# EAGLE board Motherboard Rev B - Initial Draft (EAGLE 9.1.1)
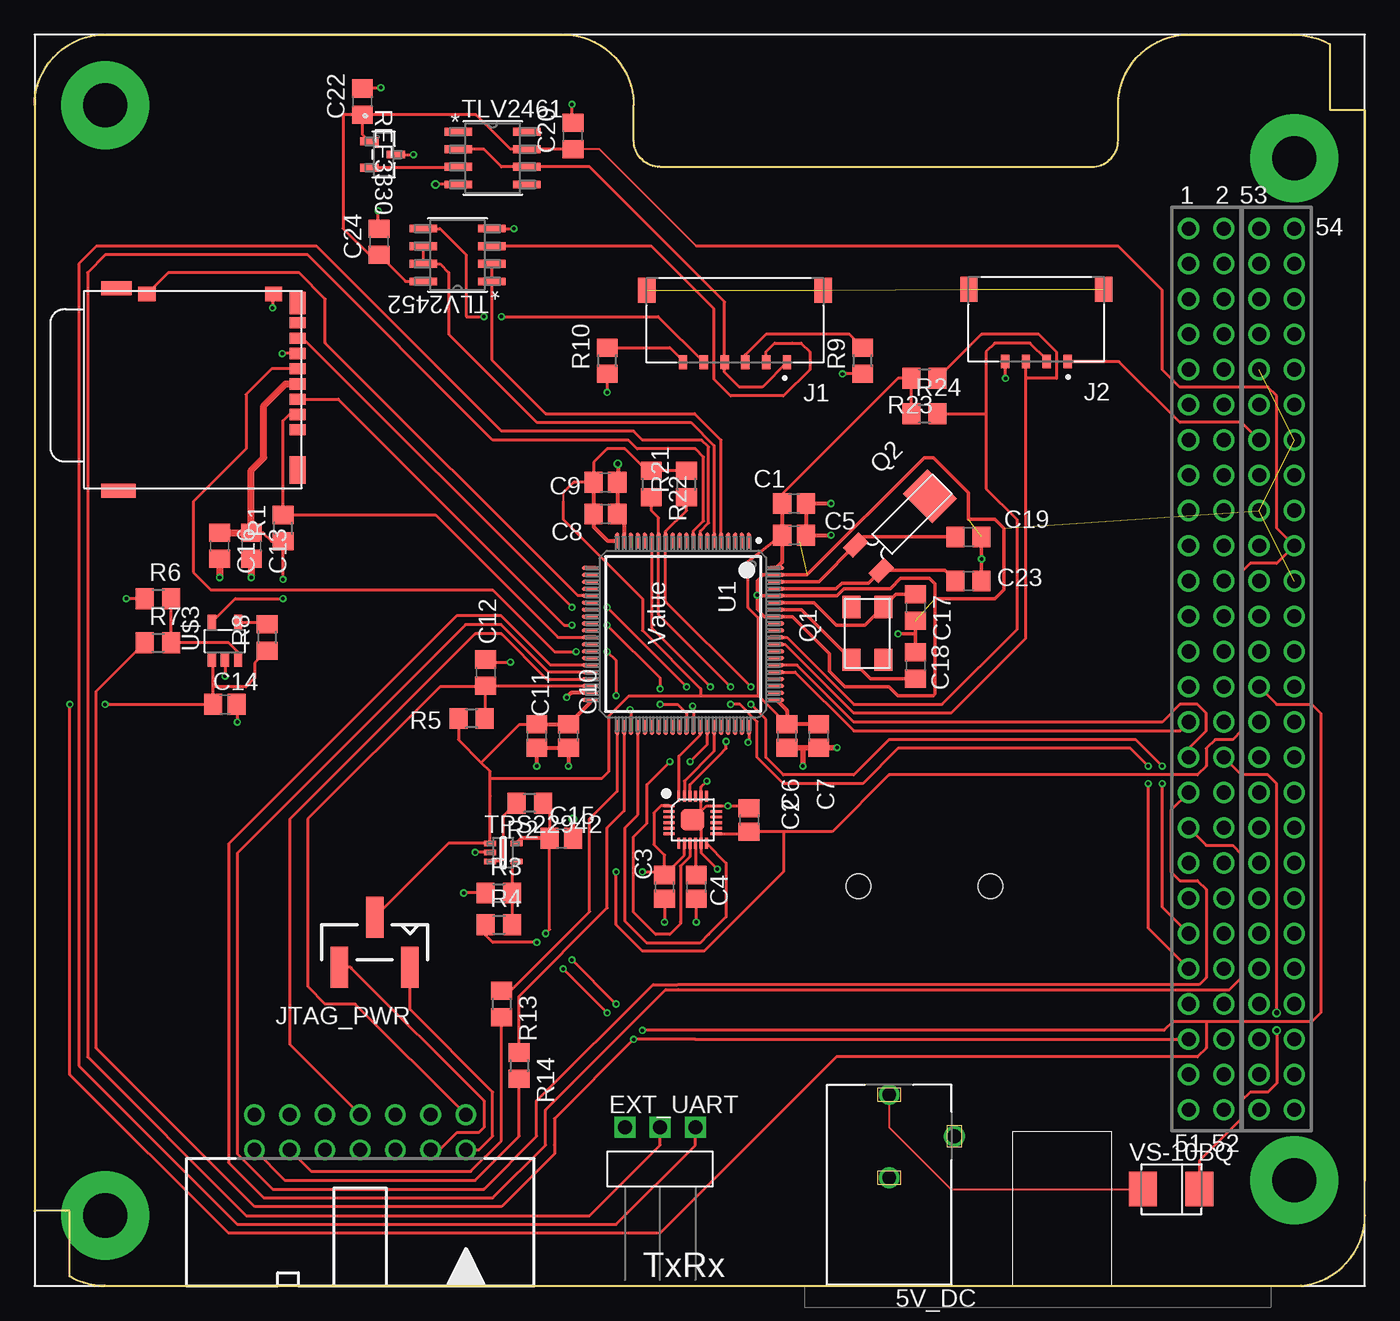
[diagram p0: board, top side]
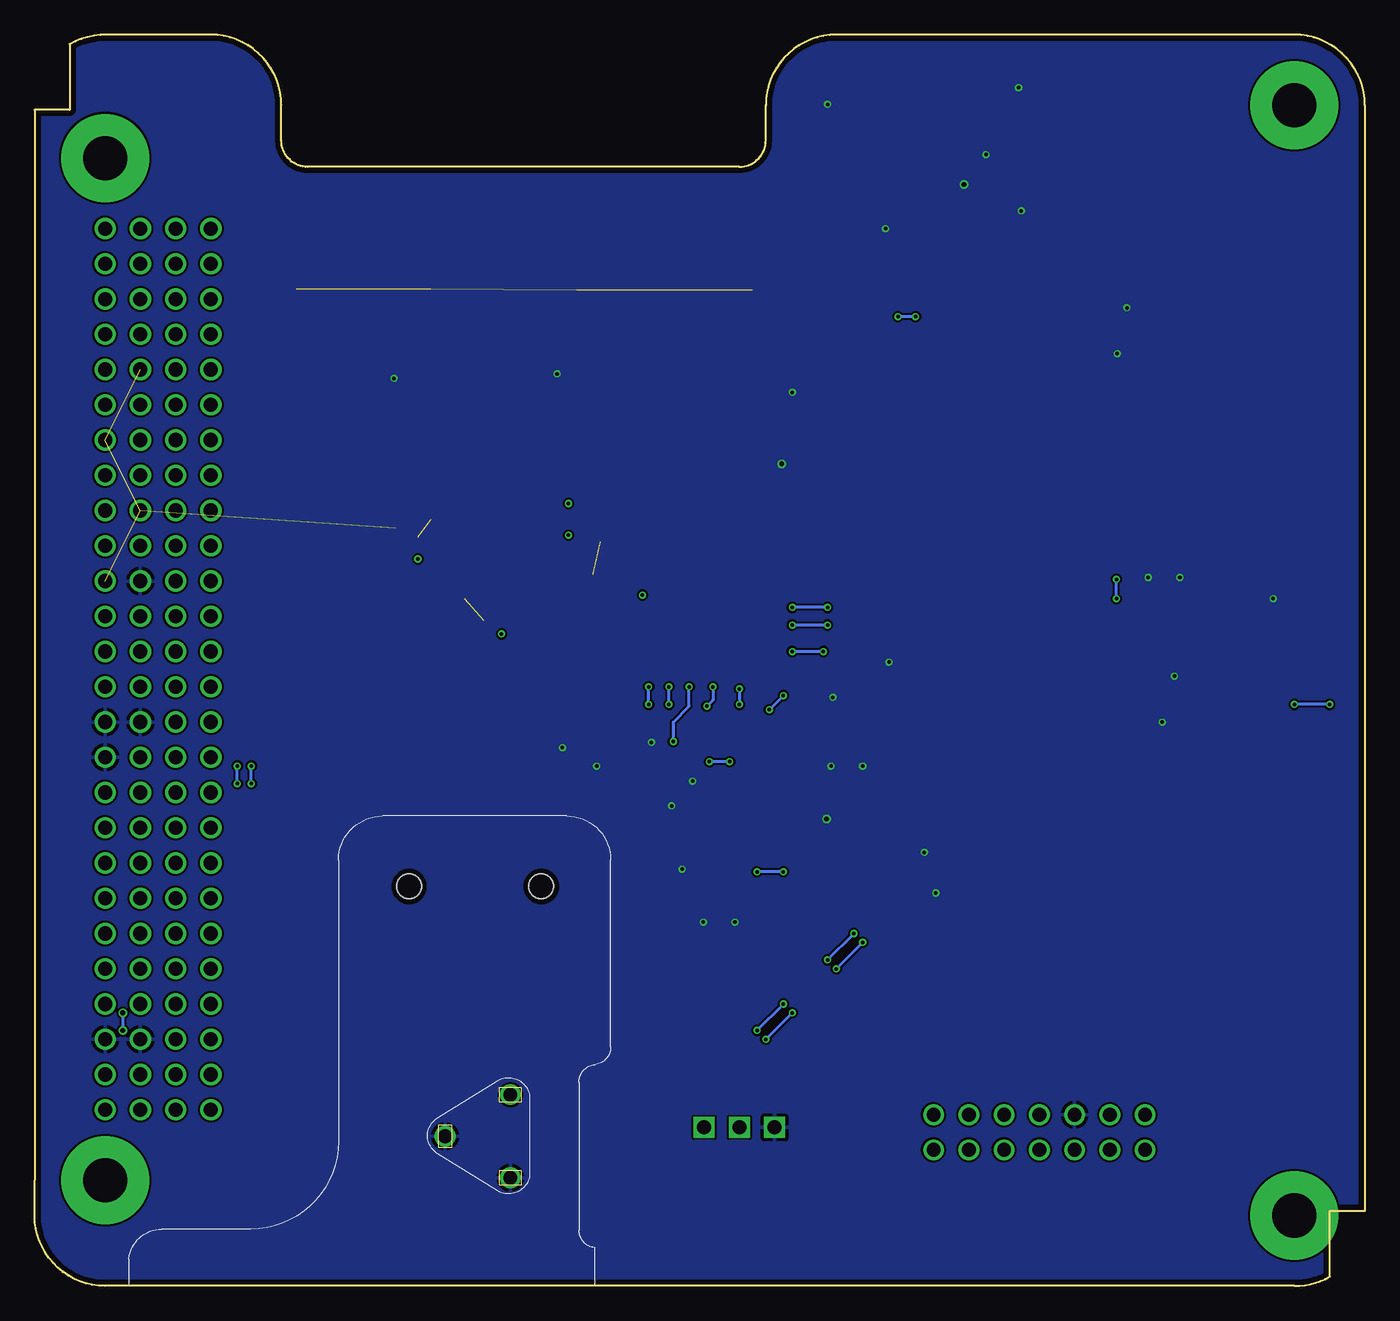
[diagram p1: board, bottom side, seen from below]

Size 95.89 x 90.17 mm. Coordinates in mm from the lower left corner, seen from the top.
Outline: 0,85.09 0,5.41 2.23,5.41 2.52,5.41 2.52,0.69 arc31 5.08,0 90.81,0 arc90 95.89,5.08 95.89,7.62 95.89,84.76 93.37,84.76 93.37,89.48 arc30 90.68,90.17 83.19,90.17 arc90 78.11,85.09 78.11,82.55 arc-90 76.2,80.64 45.09,80.64 arc-90 43.18,82.55 43.18,85.09 arc90 38.1,90.17 5.08,90.17 arc90 0,85.09
Copper layers (1*16): Top 0.035559375mm / dielectric 1.6mm / Bottom 0.035559375mm
Design rules "oshpark-2layer": minimum track width 6mil, minimum drill 10mil, track to track 6mil, track to pad 6mil, pad to pad 6mil, via to via 6mil, smd to smd 6mil, copper to edge 15mil, drill to drill 6mil, minimum pad ring 5mil, minimum via ring 5mil, stop-mask expansion 2.5mil, vias tented up to drill 0mil, thermal gap 10mil

## Footprints (pad centres in the part's own frame; a part is rotated, then mirrored left to right if it is on the bottom)
CUI_PJ-102A = drill 1: 1 0,-3; 2 0,3; 3 -4.7,0
C0805 = smd 1.3 x 1.5: 1 -0.85,0; 2 0.85,0
C0805' = smd 1.3 x 1.5: 1 -0.95,0; 2 0.95,0
90121-0763 = drill 1 square: 1 0,0; 2 2.54,0; 3 5.08,0
MOLEX_5040500691 = smd 0.6 x 1: 1 -3.75,3.04; 2 -2.25,3.04; 3 -0.75,3.04; 4 0.75,3.04; 5 2.25,3.04; 6 3.75,3.04 | smd 1.25 x 1.8: SH1 6.355,-2.15; SH2 -6.355,-2.15
MOLEX_5040500491 = smd 0.6 x 1: 1 -2.25,3.04; 2 -0.75,3.04; 3 0.75,3.04; 4 2.25,3.04 | smd 1.25 x 1.8: SH1 4.855,-2.15; SH2 -4.855,-2.15
SL_87898_3 = smd 1.27 x 2.946: 1 -2.54,1.803; 2 0,-1.803; 3 2.54,1.803
5X3.2 = smd 1.6 x 1.3: 1 0.6,2.75; 2 4.4,0.45; NC1 0.6,0.45; NC2 4.4,2.75
MS1V-T1K = smd 1.6 x 1: 1 7.5,1.3; 2 7.5,-1.3 | smd 2.5 x 3: MNT 1.25,0
R0805 = smd 1.3 x 1.5: 1 -0.95,0; 2 0.95,0
RBF_MOUNT = hole 1.778: 28.793,29.718; 28.793,20.193
DBZ3 = smd 0.559 x 1.321: 1 -0.95,-1.016; 2 0.95,-1.016; 3 0,0.883
502702 = smd 0.8 x 1.16: 1 4.9,0.58; 2 6,0.58; 3 7.1,0.58; 4 8.2,0.58; 5 9.3,0.58; 6 10.4,0.58; 7 11.5,0.58; 8 12.6,0.58 | smd 1.05 x 1.25: DET 14.685,11.45; GND 14.685,2.325 | smd 1 x 2.5: MNT1 0.5,13.5 | smd 2 x 1.16: MNT2 2,0.58 | smd 1.6 x 1.16: MNT3 14.04,0.58 | smd 1 x 2.2: MNT4 15.1,13.65
D8 = smd 1.981 x 0.559: 1 -2.464,1.905; 2 -2.464,0.635; 3 -2.464,-0.635; 4 -2.464,-1.905; 5 2.464,-1.905; 6 2.464,-0.635; 7 2.464,0.635; 8 2.464,1.905
DCK0005A = smd 0.85 x 0.4: 1 -0.95,0.65; 2 -0.95,0; 3 -0.95,-0.65; 4 0.95,-0.65; 5 0.95,0.65
PN0080A_N = smd 1.15 x 0.3: 1 -6.725,4.75; 2 -6.725,4.25; 3 -6.725,3.75; 4 -6.725,3.25; 5 -6.725,2.75; 6 -6.725,2.25; 7 -6.725,1.75; 8 -6.725,1.25; 9 -6.725,0.75; 10 -6.725,0.25; 11 -6.725,-0.25; 12 -6.725,-0.75; 13 -6.725,-1.25; 14 -6.725,-1.75; 15 -6.725,-2.25; 16 -6.725,-2.75; 17 -6.725,-3.25; 18 -6.725,-3.75; 19 -6.725,-4.25; 20 -6.725,-4.75; 41 6.725,-4.75; 42 6.725,-4.25; 43 6.725,-3.75; 44 6.725,-3.25; 45 6.725,-2.75; 46 6.725,-2.25; 47 6.725,-1.75; 48 6.725,-1.25; 49 6.725,-0.75; 50 6.725,-0.25; 51 6.725,0.25; 52 6.725,0.75; 53 6.725,1.25; 54 6.725,1.75; 55 6.725,2.25; 56 6.725,2.75; 57 6.725,3.25; 58 6.725,3.75; 59 6.725,4.25; 60 6.725,4.75 | smd 0.3 x 1.15: 21 -4.75,-6.725; 22 -4.25,-6.725; 23 -3.75,-6.725; 24 -3.25,-6.725; 25 -2.75,-6.725; 26 -2.25,-6.725; 27 -1.75,-6.725; 28 -1.25,-6.725; 29 -0.75,-6.725; 30 -0.25,-6.725; 31 0.25,-6.725; 32 0.75,-6.725; 33 1.25,-6.725; 34 1.75,-6.725; 35 2.25,-6.725; 36 2.75,-6.725; 37 3.25,-6.725; 38 3.75,-6.725; 39 4.25,-6.725; 40 4.75,-6.725; 61 4.75,6.725; 62 4.25,6.725; 63 3.75,6.725; 64 3.25,6.725; 65 2.75,6.725; 66 2.25,6.725; 67 1.75,6.725; 68 1.25,6.725; 69 0.75,6.725; 70 0.25,6.725; 71 -0.25,6.725; 72 -0.75,6.725; 73 -1.25,6.725; 74 -1.75,6.725; 75 -2.25,6.725; 76 -2.75,6.725; 77 -3.25,6.725; 78 -3.75,6.725; 79 -4.25,6.725; 80 -4.75,6.725
PC104_NO_DIMENSION = drill 1.016 pad 1.524: 1 83.185,76.2; 2 85.725,76.2; 3 83.185,73.66; 4 85.725,73.66; 5 83.185,71.12; 6 85.725,71.12; 7 83.185,68.58; 8 85.725,68.58; 9 83.185,66.04; 10 85.725,66.04; 11 83.185,63.5; 12 85.725,63.5; 13 83.185,60.96; 14 85.725,60.96; 15 83.185,58.42; 16 85.725,58.42; 17 83.185,55.88; 18 85.725,55.88; 19 83.185,53.34; 20 85.725,53.34; 21 83.185,50.8; 22 85.725,50.8; 23 83.185,48.26; 24 85.725,48.26; 25 83.185,45.72; 26 85.725,45.72; 27 83.185,43.18; 28 85.725,43.18; 29 83.185,40.64; 30 85.725,40.64; 31 83.185,38.1; 32 85.725,38.1; 33 83.185,35.56; 34 85.725,35.56; 35 83.185,33.02; 36 85.725,33.02; 37 83.185,30.48; 38 85.725,30.48; 39 83.185,27.94; 40 85.725,27.94; 41 83.185,25.4; 42 85.725,25.4; 43 83.185,22.86; 44 85.725,22.86; 45 83.185,20.32; 46 85.725,20.32; 47 83.185,17.78; 48 85.725,17.78; 49 83.185,15.24; 50 85.725,15.24; 51 83.185,12.7; 52 85.725,12.7; 53 88.265,76.2; 54 90.805,76.2; 55 88.265,73.66; 56 90.805,73.66; 57 88.265,71.12; 58 90.805,71.12; 59 88.265,68.58; 60 90.805,68.58; 61 88.265,66.04; 62 90.805,66.04; 63 88.265,63.5; 64 90.805,63.5; 65 88.265,60.96; 66 90.805,60.96; 67 88.265,58.42; 68 90.805,58.42; 69 88.265,55.88; 70 90.805,55.88; 71 88.265,53.34; 72 90.805,53.34; 73 88.265,50.8; 74 90.805,50.8; 75 88.265,48.26; 76 90.805,48.26; 77 88.265,45.72; 78 90.805,45.72; 79 88.265,43.18; 80 90.805,43.18; 81 88.265,40.64; 82 90.805,40.64; 83 88.265,38.1; 84 90.805,38.1; 85 88.265,35.56; 86 90.805,35.56; 87 88.265,33.02; 88 90.805,33.02; 89 88.265,30.48; 90 90.805,30.48; 91 88.265,27.94; 92 90.805,27.94; 93 88.265,25.4; 94 90.805,25.4; 95 88.265,22.86; 96 90.805,22.86; 97 88.265,20.32; 98 90.805,20.32; 99 88.265,17.78; 100 90.805,17.78; 101 88.265,15.24; 102 90.805,15.24; 103 88.265,12.7; 104 90.805,12.7 | drill 3.175 pad 6.35: MNT1 5.08,85.09; MNT2 5.08,5.08; MNT3 90.805,81.28; MNT4 90.805,7.62
LEAD-QFN24 = smd 0.8 x 0.2: 1 -1.7,1; 2 -1.7,0.6; 3 -1.7,0.2; 4 -1.7,-0.2; 5 -1.7,-0.6; 6 -1.7,-1; 13 1.7,-1; 14 1.7,-0.6; 15 1.7,-0.2; 16 1.7,0.2; 17 1.7,0.6; 18 1.7,1 | smd 0.2 x 0.8: 7 -1,-1.7; 8 -0.6,-1.7; 9 -0.2,-1.7; 10 0.2,-1.7; 11 0.6,-1.7; 12 1,-1.7; 19 1,1.7; 20 0.6,1.7; 21 0.2,1.7; 22 -0.2,1.7; 23 -0.6,1.7; 24 -1,1.7 | smd 1.7 x 1.54: 25 0,0
SOT23-5 = smd 0.6 x 1.05: 1 -0.95,-1.35; 2 0,-1.35; 3 0.95,-1.35; 4 0.95,1.35; 5 -0.95,1.35
SMB = smd 2.007 x 2.489: A -2.019,0; C 2.045,0
PAK100/2500-5-14 = drill 1 pad 1.422: 1 -20.16,-12.345; 2 -20.16,-9.805; 3 -17.62,-12.345; 4 -17.62,-9.805; 5 -15.08,-12.345; 6 -15.08,-9.805; 7 -12.54,-12.345; 8 -12.54,-9.805; 9 -10,-12.345; 10 -10,-9.805; 11 -7.46,-12.345; 12 -7.46,-9.805; 13 -4.92,-12.345; 14 -4.92,-9.805

## Placement (x,y rotation side)
5V_DC  PJ-102A  [CUI_PJ-102A]  61.59,10.79 180 top
C1  0.1uF  [C0805]  54.74,56.39 0 top
C2  0.1uF  [C0805]  51.5,33.59 90 top
C3  10nF  [C0805]  45.4,28.77 270 top
C4  0.1uF  [C0805]  47.69,28.77 270 top
C5  1uF  [C0805]  54.74,54.1 0 top
C6  0.1uF  [C0805]  54.23,39.62 270 top
C7  1uF  [C0805]  56.52,39.62 270 top
C8  0.1uF  [C0805]  41.15,55.63 0 top
C9  1uF  [C0805]  41.15,57.91 0 top
C10  0.1uF  [C0805]  38.48,39.62 270 top
C11  1uF  [C0805]  36.2,39.62 270 top
C12  1nF  [C0805']  32.51,44.2 90 top
C13  10uF  [C0805']  15.62,53.34 270 top
C14  10uF  [C0805]  13.72,41.91 0 top
C15  10uF  [C0805]  37.97,32.26 0 top
C16  0.1uF  [C0805']  13.34,53.34 270 top
C17  35pF  [C0805']  63.5,48.9 270 top
C18  35pF  [C0805']  63.5,44.7 90 top
C19  12pF  [C0805']  67.31,53.98 0 top
C20  0.1uF  [C0805']  38.8,82.87 90 top
C22  0.1uF  [C0805']  23.62,85.34 90 top
C23  12pF  [C0805']  67.31,50.8 0 top
C24  0.1uF  [C0805']  24.83,75.25 90 top
EXT_UART  90121-0763  [90121-0763]  42.55,11.43 0 top
J1  MOLEX_504050-0691  [MOLEX_5040500691]  50.48,69.6 180 top
J2  MOLEX_504050-0491  [MOLEX_5040500491]  72.2,69.66 180 top
JTAG_PWR  MOLEX_SL_03-87898  [SL_87898_3]  24.51,24.77 180 top
Q1  16M  [5X3.2]  58.42,49.53 270 top
Q2  32.768k  [MS1V-T1K]  65.41,57.78 225 top
R1  47k  [R0805]  17.91,54.61 90 top
R2  100k  [R0805]  35.69,34.8 180 top
R3  100k  [R0805]  33.46,28.32 0 top
R4  0  [R0805]  33.46,26.04 0 top
R5  47k  [R0805]  31.5,40.89 180 top
R6  100k  [R0805]  8.89,49.53 0 top
R7  0  [R0805]  8.89,46.35 0 top
R8  100k  [R0805]  16.76,46.74 90 top
R9  100  [R0805]  59.69,66.67 90 top
R10  100  [R0805]  41.27,66.67 90 top
R13  0  [R0805]  33.66,20.32 270 top
R14  0  [R0805]  34.92,15.88 270 top
R21  10k  [R0805]  46.99,57.78 90 top
R22  10k  [R0805]  44.45,57.78 270 top
R23  10k  [R0805]  64.14,65.41 180 top
R24  10k  [R0805]  64.14,62.87 0 top
RBF_MOUNT  [RBF_MOUNT]  89.09,0 90 top
REF3330  REF3330_DBZ_3  [DBZ3]  25.15,81.53 270 top
SD_CONN  502702-0891  [502702]  19.55,56.8 90 top
TLV2452  TLV2452  [D8]  30.48,74.3 180 top
TLV2461  TLV2461A_D_8  [D8]  33.02,81.28 0 top
TPS22942  TPS22942DCKR  [DCK0005A]  33.78,31.24 0 top
U1  Value  [PN0080A_N]  46.74,46.99 270 top
U$1  PC104_NO_DIMENSION  [PC104_NO_DIMENSION]  0,0 0 top
U$2  MPU-9250  [LEAD-QFN24]  47.43,33.59 0 top
U$3  FPF2105  [SOT23-5]  13.72,46.48 0 top
VS-10BQ  10BQ015HM3  [SMB]  81.92,6.99 0 top
X1  2514-5  [PAK100/2500-5-14]  10.92,0 180 top

## Library data of the parts
5V_DC = PJ-102A; AVAILABILITY: Good; DESCRIPTION: 2.0 mm Center Pin%2C 2.5 A%2C Right Angle%2C Through Hole%2C Tapered Pins%2C Dc Power Jack Connector; MANUFACTURER: CUI inc; MF: CUI; MP: PJ-102A; PACKAGE: None; PRICE: 0.44 USD
C1-C11 C14 C15 = adafruit
C12 C13 C16-C20 C22-C24 R1-R10 R13 R14 R21-R24 = resistor
EXT_UART = Molex 90121-0763
J1 = Molex 504050; AVAILABILITY: Good; DESCRIPTION: Conn Wire to Board HDR 5 POS 1.5mm Solder RA SMD Pico-Lock; MF: Molex; MP: 5040500491; PACKAGE: None
J2 = Molex 504050-0491; AVAILABILITY: Good; DESCRIPTION: Conn Wire to Board HDR 4 POS 1.5mm Solder RA SMD Pico-Lock; MF: Molex; MP: 5040500491; PACKAGE: None
JTAG_PWR = molex-sl-connectors_jw
Q1 = C5BQ
Q2 = MS1V-T1K
RBF_MOUNT U$1 = Cubesat
REF3330 = REF3330; MANUFACTURER_PART_NUMBER: ref3330_dbz_3; VENDOR: Texas Instruments
SD_CONN = Molex SD - 502702
TLV2452 TLV2461 = TLV24xx; MANUFACTURER_PART_NUMBER: tlv2461a_d_8; VENDOR: Texas Instruments
TPS22942 = TPS22942
U1 = VT_Parts_Eagle; MANUFACTURER: Texas Instruments; PARTNUMBER: MSP430FR5994IPNR; REFDES: RefDes; TYPE: TYPE
U$2 = VT_Parts_Eagle
U$3 = FPF2105
VS-10BQ = Vishay 10BQ015HM3
X1 = con-3m

## Nets
3V: J1.1 J1.4 TLV2461.2 TLV2461.6
3V3: C14.1 C15.1 R2.1 R8.1 TPS22942.5 U$1.79 U$3.1
3V3_SD: C13.1 C16.1 R1.1 SD_CONN.4 U$3.5
3V3_UC: C1.1 C5.1 C6.1 C7.1 C8.1 C9.1 C10.1 C11.1 JTAG_PWR.2 R5.2 R21.2 R22.1 R23.2 R24.1 TPS22942.1 U1.20 U1.40 U1.61 U1.80
3V_REF: REF3330.2 TLV2461.3
5V_CHG: U$1.32 VS-10BQ.C
AGND: C1.2 C5.2 C17.2 C18.2 C19.2 C23.2 U1.73 U1.76 U1.79 U$1.61 U$1.66 U$1.69 U$1.74
CLK_IMU: U1.55 U$2.23
CLK_SD: SD_CONN.5 U1.43
CS_IMU: U1.15 U$2.22
CS_SD: R1.2 SD_CONN.2 U1.31
DNU_TEMP_ADC: U1.4
EXT_RXD: EXT_UART.3 U1.8
EXT_TXD: EXT_UART.2 U1.9
GND: 5V_DC.2 5V_DC.3 C2.2 C3.2 C4.2 C6.2 C7.2 C8.2 C9.2 C10.2 C11.2 C12.2 C13.2 C14.2 C15.2 C16.2 C20.2 C22.2 C24.2 EXT_UART.1 J2.4 R3.1 R6.1 R9.1 R10.1 REF3330.3 SD_CONN.6 SD_CONN.GND TLV2452.4 TLV2461.4 TPS22942.2 U1.19 U1.39 U1.60 U$1.73 U$1.81 U$1.82 U$1.84 U$1.99 U$1.100 U$2.11 U$2.18 U$2.20 U$2.25 U$3.2 X1.9
INT_IMU: U1.44 U$2.12
JTAG_RXD: R13.1 U1.41
JTAG_TXD: R14.1 U1.42
LI_OA_RESET: R4.1 R7.1 U$1.47
LITHIUM_RX: U1.65 U$1.29
LITHIUM_TX: U1.66 U$1.31
MISO_IMU: U1.54 U$2.9
MISO_SD: SD_CONN.7 U1.52
MOSI_IMU: U1.53 U$2.24
MOSI_SD: SD_CONN.3 U1.51
N$1: R2.2 TPS22942.3
N$2: R6.2 R7.2 U$3.3
N$3: C4.1 U$2.10
N$4: C17.1 Q1.1 U1.75
N$5: R3.2 R4.2 TPS22942.4
N$7: R8.2 U$3.4
N$8: R14.2 X1.14
N$9: C23.1 Q2.1 U1.77
N$11: R13.2 X1.12
N$12: C18.1 Q1.2 U1.74
N$13: C19.1 Q2.2 U1.78
N$14: 5V_DC.1 VS-10BQ.A
PINAVL1_RX: U1.35 U$1.35
PINAVL1_TX: U1.36 U$1.33
SBWTCK: U1.37 X1.7
SBWTDIO: C12.1 R5.1 U1.38 X1.1
SCL_ANT: J2.2 R24.2 U1.70
SCL_EPS: R22.2 U1.14 U$1.43
SD_DETECT: SD_CONN.DET U1.25
SDA_ANT: J2.3 R23.1 U1.69
SDA_EPS: R21.1 U1.13 U$1.41
SHIELD: J1.SH1 J1.SH2 J2.SH1 J2.SH2
SW5: J2.1 U$1.65
SW10: C2.1 C3.1 C20.1 C22.1 C24.1 REF3330.1 TLV2452.8 TLV2461.7 U$1.72 U$2.1 U$2.8 U$2.13
TMP1: J1.2 TLV2452.3
TMP1_OUT: TLV2452.1 TLV2452.2 U1.5
TMP1_RET: J1.3 R9.2
TMP2: J1.5 TLV2452.5
TMP2_OUT: TLV2452.6 TLV2452.7 U1.6
TMP2_RET: J1.6 R10.2
VCC_TARGET: JTAG_PWR.3 X1.4
VCC_TOOL: JTAG_PWR.1 X1.2

## Tracks (layer width: path | path; a pad name or v marks a point on that pad's centre or on a via)
3V
  Top 0.203: TLV2461.2 32.38,81.92 33.66,80.64 TLV2461.6 40.01,80.64 49.73,70.92 J1.4 49.73,65.84 50.8,64.77 52.45,64.77 J1.1
3V3  (via drill 0.25)
  Top 0.203: U$1.79 89.53,41.91 92.08,41.91 92.71,41.27 92.71,19.68 92.08,19.05 84.45,19.05 | 84.45,19.05 82.04,19.05 | 82.04,19.05 | 12.87,43.18 C14.1 v5.08,41.91 | 12.87,43.18 12.87,45.03 U$3.1 | R8.1 15.88,44.9 15.88,43.81 15.24,43.18 12.87,43.18 | 84.45,19.05 | 84.45,19.05 84.45,17.14 83.82,16.51 57.78,16.51 45.09,3.81 13.97,3.81 2.54,15.24 v2.54,41.91 | 82.04,19.05 81.41,18.41 v43.81,18.41 | R2.1 37.12,34.31 C15.1 37.12,25.69 v36.83,25.4 | v41.91,20.32 v38.73,23.5
  Top 0.305: C15.1 35.1,32.26 TPS22942.5
  Bottom 0.203: v43.81,18.41 v41.91,20.32 | v38.73,23.5 v36.83,25.4 | v2.54,41.91 v5.08,41.91
3V3_SD  (via drill 0.25)
  Top 0.203: C13.1 16.45,54.29 17.08,53.66 R1.1 | R1.1 | U$3.5 14.46,49.53 v17.91,49.53 | v17.91,50.93 R1.1
  Top 0.508: C16.1 C13.1 15.62,58.8 16.51,59.69 16.51,63.44 18.07,65 SD_CONN.4
  Bottom 0.203: v17.91,49.53 v17.91,50.93
3V3_UC
  Top 0.152: 38.1,57.15 | 38.1,57.15 38.1,56.52
  Top 0.203: 32.2,37.72 34.95,40.47 C11.1 | 32.83,36.58 40.89,36.58 41.4,37.08 41.4,41.08 42.84,42.52 48.01,42.52 | JTAG_PWR.2 29.84,31.89 TPS22942.1 32.83,35.31 32.83,36.58 | C5.1 51.44,52.2 51.44,48.88 52.18,48.14 52.18,42.52 | 32.83,36.58 32.83,37.08 32.2,37.72 | R5.2 30.55,39.37 32.2,37.72 | 52.18,42.52 C6.1 | 48.01,42.52 52.18,42.52 | R21.2 R22.1 44.13,58.73 42.55,60.33 41.27,60.33 40.3,59.35 C9.1 38.86,57.91 38.1,57.15 | R24.1 R23.2 62.23,65.41 53.89,57.06 C1.1 | 38.1,56.52 38.1,55.24 43.81,49.53 43.81,47.24 48.01,43.05 48.01,42.52
  Top 0.305: C11.1 C10.1 40.01,42 U1.40 | C9.1 C8.1 40.3,54.7 41.28,53.72 U1.20 | C1.1 C5.1 53.89,52.17 U1.80 | C7.1 C6.1 54.23,41.47 U1.61
3V_REF
  Top 0.203: TLV2461.3 30.5,80.58 REF3330.2
5V_CHG  (via drill 0.35)
  Top 0.203: v89.53,19.68 89.53,36.2 | VS-10BQ.C 83.96,9.03 87,12.06 87,13.34 87.63,13.97 88.9,13.97 89.53,14.61 v89.53,18.41 | 89.53,36.2 | 89.53,36.2 88.9,36.83 87,36.83 U$1.32
  Bottom 0.203: v89.53,19.68 v89.53,18.41
AGND  (via drill 0.25)  (7 unrouted)
  Top 0.254: 53.34,51.24 52.51,51.24 52.09,50.82 52.09,49.8 v52.07,49.78 | 53.34,51.24 U1.79 | C17.2 63.5,46.99 | 63.5,46.99 63.5,46.35 C18.2 | 63.5,46.99 v62.23,46.99 | v52.07,49.78 52.11,49.74 U1.76 57.84,49.74 58.35,50.25 61.68,50.25 62.42,50.99 64.52,50.99 64.9,50.61 64.9,50.16 | v52.07,49.78 52.09,49.76 52.09,48.77 52.62,48.24 U1.73 54.63,48.24 57.31,45.56 57.31,44.29 58.42,43.18 61.59,43.18 62.23,42.55 64.77,42.55 64.9,42.67 64.9,49.53 | C19.2 v68.26,52.39 C23.2 | 64.9,50.16 64.9,49.97 | 64.9,50.16 | 64.9,50.16 64.9,49.53 | 64.9,49.53 69.22,49.53 69.85,50.16 69.85,54.61 69.22,55.24 67.31,55.24 67.31,57.15 64.77,59.69 64.14,59.69 55.69,51.24 53.34,51.24
  Top 0.305: v57.4,56.39 C1.2 C5.2 v57.4,54.1
  Top 0.381: 55.12,53.63 C5.2
CLK_IMU
  Top 0.203: U1.55 48.99,38.54 46.83,36.39 U$2.23
CLK_SD  (via drill 0.25)
  Top 0.203: SD_CONN.5 17.09,66.1 15.24,64.25 15.24,60.33 11.43,56.52 11.43,51.44 12.7,50.16 33.02,50.16 37.47,45.72 v39.03,45.72 | v41.27,45.72 41.91,45.09 v41.91,42.55 | v42.93,41.53 42.99,41.47 U1.43
  Bottom 0.203: v39.03,45.72 v41.27,45.72 | v41.91,42.55 v42.93,41.53
CS_IMU  (via drill 0.25)
  Top 0.203: U1.15 44.49,47.4 v48.7,43.18 | U$2.22 47.23,36.12 49.4,38.29 49.85,38.73 v49.85,39.24
  Bottom 0.203: v49.85,39.24 49.85,40.64 48.7,41.78 v48.7,43.18
CS_SD
  Top 0.203: SD_CONN.2 18.35,62.8 17.91,62.36 R1.2 28.89,55.56 37.72,46.74 U1.31
EXT_RXD
  Top 0.203: U1.8 47.99,54.4 48.58,54.99 48.58,60.46 48.08,60.96 43.81,60.96 43.18,61.59 33.66,61.59 20.32,74.93 4.45,74.93 3.17,73.66 3.17,15.88 14.61,4.45 41.91,4.45 47.62,10.16 EXT_UART.3
EXT_TXD
  Top 0.203: U1.9 47.49,54.41 48.22,55.14 48.22,59.73 47.62,60.33 43.43,60.33 42.8,60.96 33.02,60.96 19.68,74.3 5.08,74.3 3.81,73.03 3.81,16.51 15.24,5.08 40.01,5.08 45.09,10.16 EXT_UART.2
GND  (via drill 0.25, 0.35)
  Top 0.203: C2.2 51.35,34.59 v49.97,34.59 U$2.18 48.43,34.59 U$2.25 48.03,32.99 U$2.11 48.03,31.21 v49.21,30.04 | C4.2 v47.69,26.23 | C3.2 v45.4,26.23 | v48.45,36.39 48.03,35.97 U$2.20 48.03,34.19 | U1.60 51.49,39.23 v51.44,39.18 | v34.29,44.96 32.7,44.96 C12.2 | TPS22942.2 v31.75,31.24 | R3.1 v30.92,28.32 | TLV2461.4 v28.89,79.38 | REF3330.3 v27.3,81.53 | C20.2 38.73,83.88 v38.73,85.15 | C22.2 23.69,86.36 v24.96,86.36 | TLV2452.4 v34.54,76.2 | C14.2 14.61,41.87 v14.61,40.64 | R6.1 v6.6,49.53 | SD_CONN.GND 17.14,71.41 v17.14,70.48 | SD_CONN.6 17.86,67.2 v17.84,67.18 | U$3.2 v13.72,43.94 | J2.4 69.95,65.43 v69.98,65.41 | C24.2 24.77,76.26 v24.77,77.47 | R10.1 v41.27,64.39 | R9.1 v58.23,65.72 | 55.24,38.77 55.37,38.65
  Top 0.305: U1.39 38.68,42.74 v38.35,42.42 | v38.48,37.47 C10.2 C11.2 v36.2,37.47 | v38.8,33.66 38.8,32.28 C15.2 | U1.19 42.49,55.14 C8.2 C9.2 42.04,57.95 v42.04,59.24
  Top 0.381: C6.2 55.24,38.77 C7.2 56.54,38.8 v57.85,38.8 | 55.37,38.65 v55.37,37.47
  Top 0.508: C16.2 v13.34,51.05 | C13.2 v15.62,51.05
  pour Bottom: 95.89,90.17 95.89,0 0,0 0,90.17
INT_IMU
  Top 0.203: U$2.12 49.85,30.48 49.85,27.88 49.85,26.61 48.58,25.34 47.94,24.7 44.77,24.7 44.13,24.7 42.55,26.29 42.55,33.02 43.49,33.96 U1.44
JTAG_RXD
  Top 0.203: U1.41 41.99,35.64 40.01,33.66 40.01,26.98 34.29,21.27 R13.1
JTAG_TXD
  Top 0.203: U1.42 42.49,34.23 41.27,33.02 41.27,27.24 34.92,20.89 R14.1
LI_OA_RESET  (via drill 0.25)
  Top 0.203: U$1.47 47.62,17.78 v43.18,17.78 37.47,12.06 37.47,10.16 37.47,9.53 33.66,5.71 15.88,5.71 4.45,17.14 4.45,42.86 R7.1 | v41.27,19.68 v38.1,22.86 | v36.2,24.77 33.02,24.77 32.51,25.27 R4.1
  Bottom 0.203: v43.18,17.78 v41.27,19.68 | v38.1,22.86 v36.2,24.77
LITHIUM_RX
  Top 0.203: U1.65 54.82,44.24 59.05,40.01 64.77,40.01 82.55,40.01 U$1.29
LITHIUM_TX
  Top 0.203: U1.66 54.95,44.74 59.05,40.64 81.28,40.64 82.55,41.91 83.82,41.91 84.45,41.27 84.45,40.01 83.19,38.73 U$1.31
MISO_IMU  (via drill 0.25)
  Top 0.203: U$2.9 47.23,30.95 46.55,30.26 46.55,26.23 46.55,26.1 45.78,25.34 44.77,25.34 43.18,26.92 43.18,32.38 44.13,33.34 44.13,36.13 v45.78,37.78 | v47.24,37.78 48.49,39.02 U1.54
  Bottom 0.203: v45.78,37.78 v47.24,37.78
MISO_SD  (via drill 0.25)
  Top 0.203: SD_CONN.7 19.33,68.3 v38.73,48.9 | v41.27,48.9 v46.99,43.18 | v47.43,41.78 47.49,41.73 U1.52
  Bottom 0.203: v38.73,48.9 v41.27,48.9 | v46.99,43.18 46.99,42.23 v47.43,41.78
MOSI_IMU
  Top 0.203: U$2.24 46.43,38.18 47.99,39.73 U1.53
MOSI_SD  (via drill 0.25)
  Top 0.203: SD_CONN.3 21.89,63.9 38.16,47.62 v38.73,47.62 | v41.27,47.62 45.09,43.81 v45.09,43.03 | v45.09,41.91 46.35,41.91 46.99,41.28 U1.51
  Bottom 0.203: v38.73,47.62 v41.27,47.62 | v45.09,43.03 v45.09,41.91
N$1
  Top 0.203: R2.2 33.78,33.84 33.78,30.8 33.58,30.59 TPS22942.3
N$2
  Top 0.203: U$3.3 14.67,45.66 13.97,46.35 R7.2 R6.2
N$3
  Top 0.203: U$2.10 47.63,29.67 C4.1
N$4
  Top 0.254: U1.75 56.17,49.24 57.78,47.62 59.87,47.62 Q1.1 62.09,49.84 C17.1
N$5
  Top 0.203: TPS22942.4 34.41,30.27 R3.2 R4.2
N$7
  Top 0.203: U$3.4 16.62,47.83 R8.2
N$8
  Top 0.203: X1.14 18.03,7.62 31.75,7.62 34.92,10.79 R14.2
N$9
  Top 0.254: C23.1 65.6,51.56 Q2.1 60.12,50.66 58.18,50.66 57.76,50.24 U1.77
N$11
  Top 0.203: X1.12 19.93,8.26 31.43,8.26 33.66,10.48 R13.2
N$12
  Top 0.254: U1.74 55.26,48.74 Q1.2 60.25,43.75 C18.1
N$13
  Top 0.254: U1.78 56.52,50.74 Q2.2 59.76,53.98 C19.1
N$14
  Top 0.152: 5V_DC.1 61.59,11.43 66.04,6.99 VS-10BQ.A
PINAVL1_RX
  Top 0.203: U$1.35 84.45,31.75 86.36,31.75 87,31.11 87,22.23 86.13,21.36 46.38,21.36 45.49,21.36 36.83,12.7 36.83,10.16 33.02,6.35 16.51,6.35 13.97,8.89 13.97,31.86 30.42,48.31 33.6,48.31 37.17,44.74 U1.35
PINAVL1_TX
  Top 0.203: U$1.33 81.92,34.29 81.92,29.84 82.55,29.21 83.82,29.21 84.45,28.57 84.45,22.23 83.95,21.72 46.35,21.72 44.58,21.72 36.2,13.34 36.2,10.79 32.38,6.99 17.14,6.99 14.61,9.53 14.61,31.2 31.06,47.65 33.63,47.65 37.04,44.24 U1.36
SBWTCK
  Top 0.203: X1.7 18.41,17.39 18.41,33.66 31.75,46.99 33.66,46.99 36.91,43.74 U1.37
SBWTDIO
  Top 0.203: C12.1 R5.1 | C12.1 U1.38 | X1.1 23.11,20.32 20.95,20.32 19.68,21.59 19.68,33.66 29.21,43.18 32.45,43.18 C12.1
SCL_ANT
  Top 0.203: U1.70 54.23,46.74 59.05,41.91 65.41,41.91 70.8,47.31 70.8,55.24 68.58,57.47 68.58,62.87 | J2.2 72.95,66.75 71.75,67.94 69.22,67.94 68.58,67.31 68.58,62.87 | R24.2 68.58,62.87
SCL_EPS  (via drill 0.25)
  Top 0.203: U$1.43 80.26,25.78 v80.26,36.2 | v80.26,37.47 78.99,38.73 62.23,38.73 59.69,36.2 53.98,36.2 52.07,38.1 52.07,40.68 50.84,41.91 v50.16,41.91 | v50.16,43.18 44.99,48.36 U1.14 44.99,55.34 44.45,55.88 R22.2
  Bottom 0.203: v80.26,36.2 v80.26,37.47 | v50.16,41.91 v50.16,43.18
SD_DETECT
  Top 0.203: U1.25 39.16,49.74 20.95,67.94 20.95,71.12 19.05,73.03 9.64,73.03 SD_CONN.DET
SDA_ANT
  Top 0.203: U1.69 54.09,46.24 59.05,41.27 66.04,41.27 71.44,46.67 71.44,65.41 | J2.3 71.44,66.61 71.44,65.41 | R23.1 68.26,68.58 72.39,68.58 73.66,67.31 73.66,65.41 71.44,65.41
SDA_EPS  (via drill 0.25)
  Top 0.203: U$1.41 81.28,27.3 v81.28,36.2 | v81.28,37.47 79.38,39.37 61.59,39.37 59.05,36.83 53.98,36.83 52.7,38.1 52.7,40.83 v51.63,41.91 | v51.63,43.18 45.49,49.32 U1.13 45.49,54.38 46.99,55.88 R21.1
  Bottom 0.203: v81.28,36.2 v81.28,37.47 | v51.63,41.91 v51.63,43.18
SHIELD  (3 unrouted)
SW5
  Top 0.203: U$1.65 87,62.23 82.55,62.23 78.16,66.62 J2.1
SW10  (via drill 0.25)
  Top 0.152: 47.69,74.93 40.7,81.92 C20.1
  Top 0.203: U$2.13 51.35,32.59 C2.1 53.98,32.74 | C3.1 46.83,31.05 U$2.8 | C3.1 45.4,31.05 44.64,31.81 44.64,34.1 45.13,34.59 U$2.1 | C20.1 TLV2461.7 34.29,81.92 31.81,84.39 C22.1 | C22.1 23.62,82.99 REF3330.1 | C22.1 22.23,84.39 22.23,76.2 24.13,74.3 C24.1 26.74,72.39 TLV2452.8 | 53.98,32.74 57.51,32.74 61.59,36.83 83.82,36.83 84.45,37.47 84.45,38.73 85.09,39.37 86.36,39.37 87,40.01 87,41.27 87,51.44 87.63,52.07 89.53,52.07 U$1.72 89.53,54.61 89.53,64.14 88.9,64.77 82.55,64.77 81.28,66.04 81.28,71.75 78.11,74.93 47.69,74.93 | 53.98,32.74 53.98,29.84 48.26,24.13 43.81,24.13 41.91,26.04 v41.91,29.84 | v43.81,29.84 45.17,29.84 C3.1
  Bottom 0.203: v41.91,29.84 v43.81,29.84
TMP1
  Top 0.203: J1.2 52.73,67.34 53.34,67.94 54.61,67.94 55.24,67.94 55.88,67.31 55.88,66.04 53.98,64.14 50.16,64.14 48.96,65.34 48.96,70.42 44.45,74.93 TLV2452.3
TMP1_OUT
  Top 0.203: U1.5 49.49,60.96 47.58,62.87 36.83,62.87 32.94,66.75 TLV2452.1 TLV2452.2
TMP1_RET
  Top 0.203: J1.3 51.23,67.11 52.7,68.58 58.73,68.58 R9.2
TMP2  (via drill 0.25)
  Top 0.203: TLV2452.5 29.21,76.2 31.11,74.3 31.11,69.85 v32.38,69.85 | v33.66,69.85 44.94,69.85 J1.5
  Bottom 0.203: v32.38,69.85 v33.66,69.85
TMP2_OUT
  Top 0.203: TLV2452.6 TLV2452.7 29.21,73.66 29.84,73.03 29.84,68.58 36.2,62.23 47.31,62.23 48.99,60.55 U1.6
TMP2_RET
  Top 0.203: J1.6 46.73,66.67 45.78,67.62 R10.2
VCC_TARGET
  Top 0.203: 22.76,22.96 22.86,22.86 | 22.86,22.86 32.38,13.34 32.38,11.43 32,11.05 30.42,11.05 29.18,9.8 X1.4 | 22.86,22.86 22.76,22.96 | 22.76,22.96 JTAG_PWR.3
VCC_TOOL
  Top 0.203: X1.2 32.03,9.8 33.02,10.79 33.02,13.97 27.05,19.94 JTAG_PWR.1

## Text on the board
tPlace: Tx | Rx